# EAGLE board Battery Control (EAGLE 8.2.1)
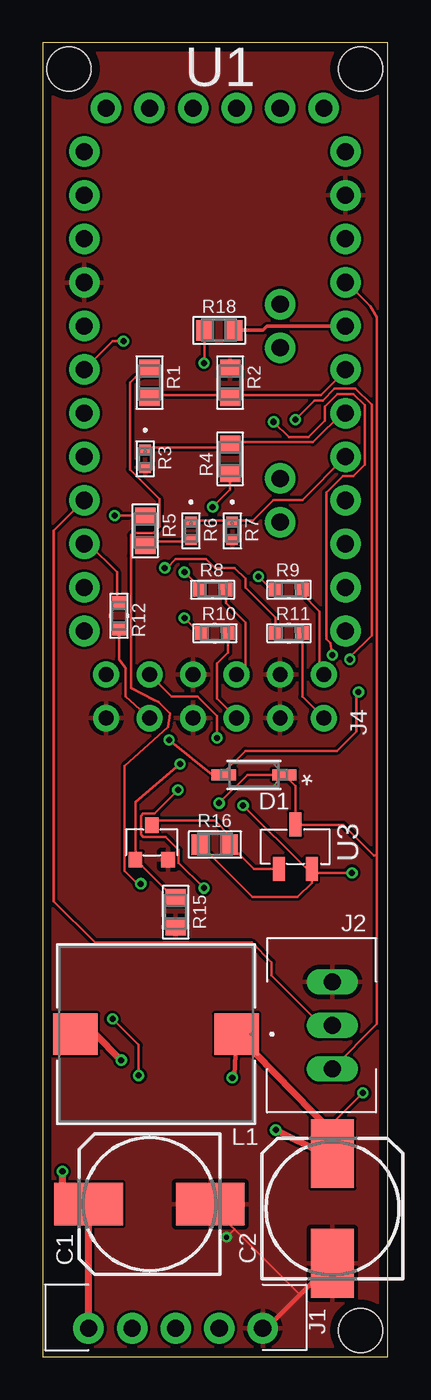
[diagram p0: board, top side]
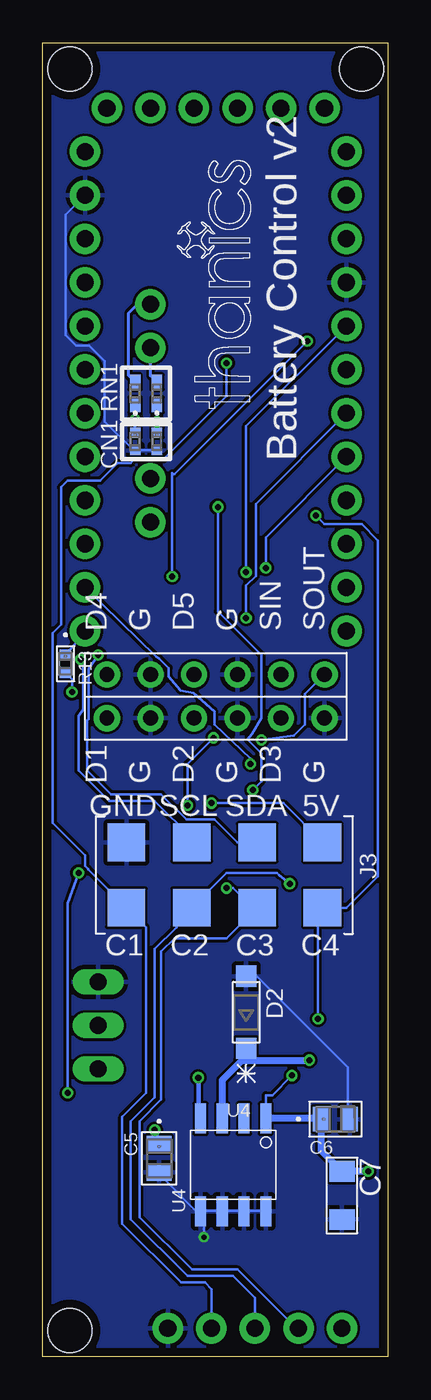
[diagram p1: board, bottom side, seen from below]

Size 20.12 x 76.57 mm. Coordinates in mm from the lower left corner, seen from the top.
Outline: 0,0 20.12,0 20.12,76.57 0,76.57 0,0
Copper layers (1*16): Top 0.035mm / dielectric 1.6mm / Bottom 0.035mm
Design rules "Elecrow_2-layer_PCB_eagle_rule": minimum track width 6mil, minimum drill 12mil, track to track 6mil, track to pad 6mil, pad to pad 6mil, via to via 8mil, smd to smd 0mil, copper to edge 20mil, drill to drill 10mil, minimum pad ring 6mil, minimum via ring 6mil, stop-mask expansion 0mil, vias tented up to drill 100mil, thermal gap 10mil
Holes 2.54 mm at 18.54,1.52 1.52,75.06 18.54,75.06

## Footprints (pad centres in the part's own frame; a part is rotated, then mirrored left to right if it is on the bottom)
0810_POLCAP = smd 4 x 2.5: + 3.55,0; - -3.55,0
0807_POLCAP = smd 4 x 2.5: + 3.2,0; - -3.2,0
G-155-M = smd 0.559 x 0.61: 1 -0.521,0; 2 0.521,0
0805 = smd 0.965 x 1.448: 1 -0.826,0; 2 0.826,0
1206_MLCC = smd 1.2 x 1.5: P$1 -1.4,0; P$2 1.4,0
SOD123-M = smd 1.416 x 0.652: A 1.776,0; C -1.776,0
SOD123 = smd 1.25 x 1.22: A 2.1,0; C -2.1,0
JST-XH_5POS = drill 1 pad 1.778: 1 0,5.08; 2 0,2.54; 3 0,0; 4 0,-2.54; 5 0,-5.08
JST-XH_3POS = drill 1 long: P$1 0,2.54; P$2 0,0; P$3 0,-2.54
7_PIN_CONNECTOR_FEMALE = smd 2.2 x 2.2: 1 0,6.35; 2 0,2.54; 3 0,-1.27; 4 0,-5.08; 5 3.81,6.35; 6 3.81,2.54; 7 3.81,-1.27; 8 3.81,-5.08
12_PIN_RIBBON_CONNECTOR = drill 0.87 pad 1.524: P$1 -1.27,6.35; P$2 -1.27,3.81; P$3 -1.27,1.27; P$4 -1.27,-1.27; P$5 -1.27,-3.81; P$6 -1.27,-6.35; P$7 1.27,6.35; P$8 1.27,3.81; P$9 1.27,1.27; P$10 1.27,-1.27; P$11 1.27,-3.81; P$12 1.27,-6.35
IND_BOURNS_SDR1105 = smd 2.591 x 2.413: 1 -4.699,0; 2 4.699,0
RC0805N = smd 1.006 x 1.2: 1 -0.853,0; 2 0.853,0
0402 = smd 0.584 x 0.686: 1 -0.546,0; 2 0.546,0
RC0603N = smd 0.762 x 0.813: 1 -0.775,0; 2 0.775,0
RC0402N-M = smd 0.864 x 0.61: 1 -0.66,0; 2 0.66,0
PRO-MINI-2 = drill 1 pad 1.778: A0 6.35,2.54; A1 6.35,0; A2 6.35,-2.54; A3 6.35,-5.08; A4 2.54,1.27; A5 2.54,3.81; A6 2.54,-8.89; A7 2.54,-6.35; D2 -8.89,2.54; D3 -8.89,0; D4 -8.89,-2.54; D5 -8.89,-5.08; D6 -8.89,-7.62; D7 -8.89,-10.16; D8 -8.89,-12.7; D9 -8.89,-15.24; D10 6.35,-15.24; D11 6.35,-12.7; D12 6.35,-10.16; D13 6.35,-7.62; DTR 5.08,15.24; GND 6.35,10.16; GND1 -8.89,5.08; GND2 -7.62,15.24; GND3 -5.08,15.24; RAW 6.35,12.7; RST 6.35,7.62; RST1 -8.89,7.62; RX1 -8.89,10.16; RX1-1 0,15.24; TX0 -8.89,12.7; TX0-1 2.54,15.24; VCC 6.35,5.08; VCC1 -2.54,15.24
SOT-23_(TO-236AB) = smd 0.8 x 0.9: D 0,-1; G 0.95,1; S -0.95,1
SC59_MOSFET = smd 0.7 x 1.4: D 0,1.3; G -0.95,-1.3; S 0.95,-1.3
SOP8 = smd 0.65 x 1.75: 1 -1.905,-2.7; 2 -0.635,-2.7; 3 0.635,-2.7; 4 1.905,-2.7; 5 1.905,2.7; 6 0.635,2.7; 7 -0.635,2.7; 8 -1.905,2.7

## Placement (x,y rotation side)
C1  100uF  [0810_POLCAP]  6.22,8.89 180 top
C2  330uF  [0807_POLCAP]  16.89,8.64 90 top
C3  1000pF  [G-155-M]  13.46,53.34 270 bottom
C4  1000pF  [G-155-M]  14.73,53.34 270 bottom
C5  0.1uF  [0805]  13.34,11.56 270 bottom
C6  0.1uF  [0805]  3.05,13.84 0 bottom
C7  10uF  [1206_MLCC]  2.67,9.4 270 bottom
D1  [SOD123-M]  12.32,33.91 180 top
D2  NRVTS245ESF_DIODE  [SOD123]  8.26,20.07 90 bottom
J1  JST-XH_5POS  [JST-XH_5POS]  7.75,1.65 270 top
J2  DS18B20_TEMP  [JST-XH_3POS]  16.89,19.3 180 top
J3  7_PIN_POGO_CONNECTOR_FEMALE  [7_PIN_CONNECTOR_FEMALE]  8.89,26.16 90 bottom
J4  12_PIN_RIBBON_CONNECTOR  [12_PIN_RIBBON_CONNECTOR]  10.03,38.48 90 bottom
L1  200uH  [IND_BOURNS_SDR1105]  6.6,18.8 180 top
R1  10k  [RC0805N]  6.22,56.77 270 top
R2  10k  [RC0805N]  10.92,56.77 270 top
R3  5k  [0402]  5.97,52.32 270 top
R4  10k  [RC0805N]  10.92,52.32 90 top
R5  10k  [RC0805N]  5.97,48.13 270 top
R6  5k  [0402]  8.64,48.13 270 top
R7  5k  [0402]  11.05,48.13 270 top
R8  90.9  [RC0603N]  9.91,44.7 0 top
R9  90.9  [RC0603N]  14.35,44.7 0 top
R10  90.9  [RC0603N]  10.03,42.16 0 top
R11  90.9  [RC0603N]  14.35,42.16 0 top
R12  140  [RC0603N]  4.45,43.18 270 top
R13  5k  [0402]  18.8,40.39 270 bottom
R14  75  [RC0402N-M]  13.46,56.13 90 bottom
R15  10k  [RC0805N]  7.75,25.91 270 top
R16  10k  [RC0805N]  10.03,29.84 0 top
R17  75  [RC0402N-M]  14.73,56.13 90 bottom
R18  10k  [RC0805N]  10.29,59.82 0 top
U1  PRO-MINI-2  [PRO-MINI-2]  11.3,57.53 0 top
U2  2N7002P_MOSFET  [SOT-23_(TO-236AB)]  6.35,29.97 180 top
U3  DMP3030SN_MOSFET  [SC59_MOSFET]  14.73,29.72 0 top
U4  SI-8050W_SWITCH_SUPPLY  [SOP8]  9.02,11.18 180 bottom

## Library data of the parts
C1 C2 C7 D2 J1-J4 U2-U4 = thanics_robotics
C3 C4 = 1000pF-capacitor; COPYRIGHT: Copyright C 2015 Accelerated Designs. All rights reserved; MANUFACTURER_PART_NUMBER: GRM155R60J102KA01D; VENDOR: Vendor
C5 C6 = 0.1uF X7R Ceramic Capacitor; COPYRIGHT: Copyright C 2015 Accelerated Designs. All rights reserved; MANUFACTURER_PART_NUMBER: 08055C104KAT2A; VENDOR: Vendor
D1 = 1n4148w-diode; COPYRIGHT: Copyright C 2015 Accelerated Designs. All rights reserved; MANUFACTURER_PART_NUMBER: 1N4148W7F; VENDOR: Diodes Inc
L1 = 200uH-inductor; COPYRIGHT: Copyright C 2015 Accelerated Designs. All rights reserved; MANUFACTURER_PART_NUMBER: SDR1105201KL; VENDOR: Bourns Electronics
R1 R2 R4 R5 R15 R16 R18 = 10k-resistor; CASE: 0805 2012 metric; COMPOSITION: Thin Film; COPYRIGHT: Copyright C 2015 Accelerated Designs. All rights reserved; DATASHEET: httpindustrial.panasonic.comwwwcgijvcr13pz.cgi?E+PZ+3+AOA0026+ERA6AEB103V+7+WW; DIGIKEYPARTNUMBER: P10KDATRND; HEIGHT: 0.024" 0.60mm; LEADSTYLE: Surface Mount SMD SMT; MANUFACTURER_PART_NUMBER: ERA6AEB103V; NUMBEROFTERMINATIONS: 2; PACKAGECASE: 0805 2012 Metric; PACKAGING: Tape &amp Reel TR; POWERWATTS: 0.125W 18W; QUANTITY_AVAILABLE: 225000; RESISTANCEINOHMS: 10.0K; RESISTANCEOHMS: 10K; SIZEDIMENSION: 0.079" L x 0.049" W 2.00mm x 1.25mm; TEMPERATURECOEFFICIENT: 25ppm°C; TOLERANCE: 0.1%; VENDOR: Panasonic; VOLTAGEWORKING: 100V
R3 R6 R7 R13 = 5k-resistor; COPYRIGHT: Copyright C 2015 Accelerated Designs. All rights reserved; MANUFACTURER_PART_NUMBER: PNM0402E5001BST1; VENDOR: Vendor
R8-R11 = 90.9-resistor; CASE: 0603 1608 metric; COMPOSITION: Thick Film; COPYRIGHT: Copyright C 2015 Accelerated Designs. All rights reserved; DATASHEET: httpwww.yageo.comdocumentsrecentPYuRC0603_51_RoHS_L_4.pdf; DIGIKEYPARTNUMBER: 31190.9HRTRND; HEIGHT: 0.022" 0.55mm; LEADSTYLE: Surface Mount SMD SMT; MANUFACTURER_PART_NUMBER: RC0603FR0790R9L; NEWARKPARTNUMBER: 66R2625; NUMBEROFTERMINATIONS: 2; PACKAGECASE: 0603 1608 Metric; PACKAGING: Tape &amp Reel TR; POWERWATTS: 0.1W 110W; QUANTITY_AVAILABLE: 30000; RESISTANCEINOHMS: 90.9; RESISTANCEOHMS: 90.9; SIZEDIMENSION: 0.063" L x 0.031" W 1.60mm x 0.80mm; TEMPERATURECOEFFICIENT: 100ppm°C; TOLERANCE: 1%; VENDOR: Yageo; VOLTAGEWORKING: 50V
R12 = 140-resistor; CASE: 0603 1608 metric; COMPOSITION: Thick Film; COPYRIGHT: Copyright C 2015 Accelerated Designs. All rights reserved; DATASHEET: httpwww.yageo.comdocumentsrecentPYuRC0603_51_RoHS_L_4.pdf; DIGIKEYPARTNUMBER: 311140HRTRND; HEIGHT: 0.022" 0.55mm; LEADSTYLE: Surface Mount SMD SMT; MANUFACTURER_PART_NUMBER: RC0603FR07140RL; NEWARKPARTNUMBER: 66R2055; NUMBEROFTERMINATIONS: 2; PACKAGECASE: 0603 1608 Metric; PACKAGING: Tape &amp Reel TR; POWERWATTS: 0.1W 110W; QUANTITY_AVAILABLE: 0; RESISTANCEINOHMS: 140; RESISTANCEOHMS: 140; SIZEDIMENSION: 0.063" L x 0.031" W 1.60mm x 0.80mm; TEMPERATURECOEFFICIENT: 100ppm°C; TOLERANCE: 1%; VENDOR: Yageo; VOLTAGEWORKING: 50V
R14 R17 = 75-resistor; CASE: 0402 1005 metric; COMPOSITION: Thick Film; COPYRIGHT: Copyright C 2015 Accelerated Designs. All rights reserved; DATASHEET: httpwww.yageo.comdocumentsrecentPYuRC0402_51_RoHS_L_6.pdf; DESCRIPTION: RES 75 OHM 116W 5% 0402 SMD; DIGIKEYPARTNUMBER: 31175JRTRND; HEIGHT: 0.016" 0.40mm; LEADSTYLE: Surface Mount SMD SMT; MANUFACTURER_PART_NUMBER: RC0402JR0775RL; NEWARKPARTNUMBER: 66R1890; NUMBEROFTERMINATIONS: 2; PACKAGECASE: 0402 1005 Metric; PACKAGING: Tape &amp Reel TR; POWERWATTS: 0.063W 116W; QUANTITY_AVAILABLE: 60000; RESISTANCEINOHMS: 75.0; RESISTANCEOHMS: 75; SIZEDIMENSION: 0.039" L x 0.020" W 1.00mm x 0.50mm; TEMPERATURECOEFFICIENT: 100ppm°C; TOLERANCE: 5%; VENDOR: Yageo; VOLTAGEWORKING: 50V
U1 = Arduino-clone

## Nets
GND: C1.- C2.- C3.2 C4.2 C5.2 C6.2 C7.P$2 D2.A J1.1 J2.P$3 J3.5 J4.P$2 J4.P$4 J4.P$6 J4.P$8 J4.P$10 R2.1 R3.2 R7.2 R15.2 U1.GND U1.GND1 U2.S U4.5 U4.6 U4.7 U4.8
N$1: R8.1 U1.D2
N$2: J4.P$9 R8.2
N$3: J2.P$2 U1.D6
N$5: D1.C J2.P$1 J3.8 U1.VCC U3.D
N$6: R14.2 U1.A4
N$7: R17.2 U1.A5
N$8: J1.2 J3.1 R18.1
N$10: J1.3 J3.2 R1.1
N$11: R1.2 R2.2 U1.A1
N$12: R3.1 R4.2 U1.A2
N$13: J1.4 J3.3 R4.1
N$14: R5.2 R6.2
N$15: R6.1 R7.1 U1.A3
N$16: C1.+ C6.1 C7.P$1 J1.5 J3.4 R5.1 U4.1
N$17: R9.1 U1.D3
N$18: J4.P$7 R9.2
N$19: R10.1 U1.D4
N$20: J4.P$3 R10.2
N$21: R11.1 U1.D5
N$22: J4.P$1 R11.2
N$23: R12.1 U1.D7
N$24: J4.P$5 R12.2
N$25: R13.1 U1.D10
N$26: R16.2 U2.D U3.G
N$27: R15.1 U1.D11 U2.G
N$28: R18.2 U1.A0
N$29: D2.C L1.2 U4.3
N$30: C3.1 J3.7 R14.1
N$31: C4.1 J3.6 R17.1
SWIN: C2.+ C5.1 J4.P$11 L1.1 R16.1 U3.S U4.4
SWOUT: D1.A J4.P$12 R13.2

## Tracks (layer width: path | path; a pad name or v marks a point on that pad's centre or on a via)
GND  (via drill 0.3)
  Top 0.152: 13.16,1.78 12.85,1.78 J1.1 | 16.81,5.44 C2.- | 14.99,3.61 11.18,7.42 | 11.18,7.42 9.8,8.79 C1.- | v10.72,6.96 11.18,7.42
  Top 0.254: 16.81,5.44 14.99,3.61 13.16,1.78
  Bottom 0.152: C3.2 14.68,52.83 C4.2 14.83,52.83 16.51,54.51 16.51,58.01 17.42,58.93 18.19,58.93 18.8,59.54 18.8,66.55 U1.GND | C5.2 13.31,10.62 11.02,8.33 U4.5 | U4.8 7.21,8.48 8.28,8.48 U4.7 8.43,8.48 9.65,8.48 | 9.65,8.48 10.72,8.48 | 10.72,8.48 10.87,8.48 U4.5 | 9.65,8.48 U4.6 | C6.2 2.34,13.97 2.34,16.87 8.13,22.66 D2.A | 10.72,8.48 v10.72,6.96 | 10.72,8.48 U4.5
  pour Bottom: 0,76.45 20.07,76.45 20.07,0 0,0
  pour Top: 0,76.45 20.07,76.45 20.07,0 0,0
N$1  (via drill 0.35)
  Top 0.152: R8.1 9.13,44.84 v8.26,45.72
  Bottom 0.152: v8.26,45.72 8.26,54.23 U1.D2
N$2
  Top 0.152: R8.2 10.68,43.93 11.81,42.8 11.81,40.26 J4.P$9
N$3
  Top 0.152: J2.P$2 16.26,19.3 13.34,22.23 13.34,22.99 12.19,24.13 3.05,24.13 0.64,26.54 0.64,48.13 U1.D6
N$5  (via drill 0.35)
  Top 0.152: 14.73,31.24 14.73,33.27 D1.C 11.94,33.91 v10.29,32.26 | 14.73,31.24 U3.D | J2.P$1 16.97,16.87 19.48,19.38 19.48,29.21 | U1.VCC 17.73,62.59 19.1,61.21 19.48,60.58 19.48,29.21 | 19.48,29.21 19.3,29.21 17.53,30.99 14.99,30.99 14.73,31.24
  Bottom 0.152: v10.29,32.26 6.1,32.26 J3.8
N$6
  Bottom 0.178: R14.2 13.84,57.18 U1.A4
N$7
  Bottom 0.178: R17.2 15.11,57.18 15.11,60.83 14.61,61.34 U1.A5
N$8  (via drill 0.35)
  Top 0.152: R18.1 9.43,57.95 v9.4,57.91
  Bottom 0.152: J1.2 10.29,3.94 10.67,4.32 12.07,4.32 15.49,7.75 15.49,13.97 14.1,15.37 14.1,25.02 J3.1 17.48,28.4 17.48,28.42 17.65,28.6 17.65,29.21 19.53,31.09 19.53,42.19 19.05,42.67 19.05,50.67 18.67,51.05 16.76,51.05 15.75,52.07 14.99,52.07 14.75,52.31 13.06,52.31 9.4,55.98 v9.4,57.91
N$10  (via drill 0.35)
  Top 0.152: R1.1 5.7,57.1 5.41,57.1 5.08,56.77 5.08,51.71 6.8,49.99 6.8,48.39 6.42,48.01 5.27,48.01 5.14,47.88 5.14,46.68 5.16,46.54 5.16,38.98 6.49,38.28 6.74,38.15 7.42,37.47 7.29,36.7 4.77,34.43 4.77,28.31 5.62,27.46 v5.71,27.56
  Bottom 0.152: J1.3 7.75,3.43 9.02,4.7 11.68,4.7 14.99,8 14.99,13.72 13.59,15.11 13.59,23.75 12.32,25.02 12.32,25.27 J3.2 9.4,28.19 6.48,28.19 6.35,28.07 v5.71,27.56
N$11
  Top 0.152: R1.2 6.3,56.03 10.87,56.03 R2.2 11.02,56.03 16.2,56.03 17.58,57.4 U1.A1
N$12
  Top 0.152: R3.1 5.99,52.98 10.72,52.98 10.87,53.14 R4.2 11.02,53.29 15.75,53.29 17.58,55.12 U1.A2
N$13  (via drill 0.35)
  Top 0.152: R4.1 10.92,50.55 v9.91,49.53 | v9.4,27.3 7.93,28.77 7.93,29.52 7.15,30.29 5.86,30.29 5.72,30.43 5.72,31.52 5.86,31.65 6.51,31.65 v7.87,33.02
  Bottom 0.152: J1.4 5.33,1.65 8.76,5.08 11.43,5.08 14.48,8.13 14.48,13.72 13.21,14.99 13.21,23.62 12.45,24.38 9.4,24.38 7.75,26.04 | 7.75,26.04 J3.3 | v9.91,49.53 9.91,43.43 7.37,40.89 7.37,37.23 7.92,36.3 8.18,35.97 7.37,35.16 7.37,33.53 v7.87,33.02 | v9.4,27.3 9.02,27.3 7.75,26.04
N$14
  Top 0.152: R6.2 8.59,47.5 6.15,47.5 5.99,47.35 R5.2
N$15
  Top 0.152: R6.1 8.74,48.72 11.02,48.72 R7.1 11.18,48.72 12.24,48.72 13.46,49.94 15.14,49.94 U1.A3
N$16  (via drill 0.35, 0.36)
  Top 0.152: v5.59,16.38 5.59,18.16 v4.06,19.69 | v4.19,49.02 5.93,49.02 R5.1
  Top 0.406: J1.5 C1.+ 1.14,8.89 v1.14,10.8
  Bottom 0.152: U4.1 7.11,15.24 6.73,15.24 v5.59,16.38 | v4.06,19.69 4.06,25.91 J3.4 2.41,26.16 0.58,27.99 0.58,47.57 1.52,48.51 3.68,48.51 v4.19,49.02
  Bottom 0.406: v1.14,10.8 C7.P$1 3.87,12 C6.1 3.91,13.88 U4.1
N$17  (via drill 0.35)
  Top 0.152: R9.1 13.34,44.7 v12.57,45.47 | v4.7,59.18 4.06,59.18 U1.D3
  Bottom 0.152: v12.57,45.47 12.57,51.43 | 12.57,51.43 12.57,51.49 | 12.57,51.43 12.45,51.43 v4.7,59.18
N$18
  Top 0.152: R9.2 15.13,44.44 16.13,43.43 16.13,40.01 J4.P$7
N$19  (via drill 0.35)
  Top 0.152: R10.1 9.14,42.16 v8.26,43.05
  Bottom 0.152: v8.26,43.05 8.26,44.93 7.7,45.49 7.7,49.71 U1.D4
N$20
  Top 0.152: R10.2 10.81,41.03 10.16,40.39 10.16,38.35 J4.P$3
N$21  (via drill 0.35)
  Top 0.152: R11.1 13.58,43.07 11.81,44.83 11.81,45.34 11.18,45.97 10.03,45.97 9.53,46.48 7.75,46.48 7.24,45.97 v7.11,45.97
  Bottom 0.152: v7.11,45.97 7.11,47.75 U1.D5
N$22
  Top 0.152: R11.2 15.13,38.47 J4.P$1
N$23
  Top 0.152: U1.D7 2.67,47.37 4.32,45.72 4.32,44.08 R12.1
N$24
  Top 0.152: R12.2 4.45,40.64 4.83,40.13 4.83,38.48 J4.P$5
N$25
  Bottom 0.178: R13.1 17.65,42.2 U1.D10
N$26
  Top 0.152: U3.G 12.31,28.42 R16.2 10.89,30.39 10.03,31.24 6.62,31.24 U2.D
N$27  (via drill 0.35)
  Top 0.152: R15.1 7.61,26.76 U2.G 5.4,32.32 v8,34.54
  Bottom 0.152: U1.D11 13.51,40.82 13.33,40.69 12.78,40.14 12.78,39.64 12.07,38.81 11.32,38.68 10.11,37.6 10.11,36.85 8,34.87 v8,34.54
N$28
  Top 0.203: R18.2 12.83,59.82 13.08,60.07 U1.A0
N$29  (via drill 0.36)
  Top 0.406: v4.57,17.27 3.05,18.8 L1.2
  Bottom 0.406: U4.3 9.65,16.13 8.51,17.27 | 8.51,17.27 v4.57,17.27 | D2.C 8.51,18.22 8.51,17.27
N$30  (via drill 0.35)
  Top 0.152: v16.89,40.89 16.76,41.6 16.54,41.83 16.54,50.37 17.49,51.33 18.12,51.33 18.77,51.99 18.77,55.45 18.12,56.11 17.19,56.11 16.45,55.37 16.45,54.55 15.49,53.59 14.35,53.59 v13.46,54.48
  Bottom 0.152: J3.7 8.77,29.97 10.1,31.3 11.74,31.3 13.21,32.77 16.13,32.77 17.53,34.16 17.53,37.08 17.45,37.16 17.45,40.08 v16.89,40.89
  Bottom 0.178: C3.1 v13.46,54.48 R14.1
N$31  (via drill 0.35)
  Top 0.152: v17.91,40.64 17.91,40.77 19.18,42.04 19.18,55.48 18.24,56.41 17.02,56.41 16.33,55.73 15.85,55.73 v14.73,54.61
  Bottom 0.152: J3.6 11.43,30.23 13.59,32.38 16.26,32.38 18.03,34.16 18.03,37.34 17.78,37.72 17.78,40.39 v17.91,40.64
  Bottom 0.178: C4.1 v14.73,54.61 R17.1
SWIN  (via drill 0.35, 0.36)
  Top 0.152: 15.68,28.19 U3.S 15.4,28.42 v11.68,32.13 | 15.68,28.19 15.68,27.62 14.86,26.8 12.23,26.8 R16.1 | C2.+ 16.89,13.59 v18.67,15.37 | v18.03,28.19 15.68,28.19 | v10.16,36.07 10.16,37.34 9.02,38.48 7.49,38.48 J4.P$11
  Top 0.254: v11.05,16.26 11.18,16.38 L1.1
  Top 0.406: L1.1 16.89,13.08 C2.+ 16.36,11.84 v13.59,13.21
  Bottom 0.152: v18.67,15.37 18.67,26.42 v18.03,28.19 | v11.68,32.13 11.68,34.54 v10.16,36.07
  Bottom 0.254: U4.4 11.05,14 v11.05,16.26
  Bottom 0.406: C5.1 13.53,12.7 v13.59,13.21
SWOUT  (via drill 0.35)
  Top 0.152: v7.37,35.94 9.91,33.91 D1.A 10.54,34.04 11.81,35.31 17.14,35.31 18.29,36.45 18.29,38.61 v18.41,38.73
  Bottom 0.152: v7.37,35.94 5.46,36.2 4.83,36.83 4.83,38.61 J4.P$12 | v18.41,38.73 18.41,39.46 R13.2

## Text on the board
bPlace: RN1 | CN1
tNames: U1 | J4 | D1 | U3 | J2 | L1 | C2 | C1 | J1
bNames: Battery Control v2 | J3 | D2 | U4 | U4